# EAGLE board DanielDist_board_1.0 (EAGLE 7.6.0)
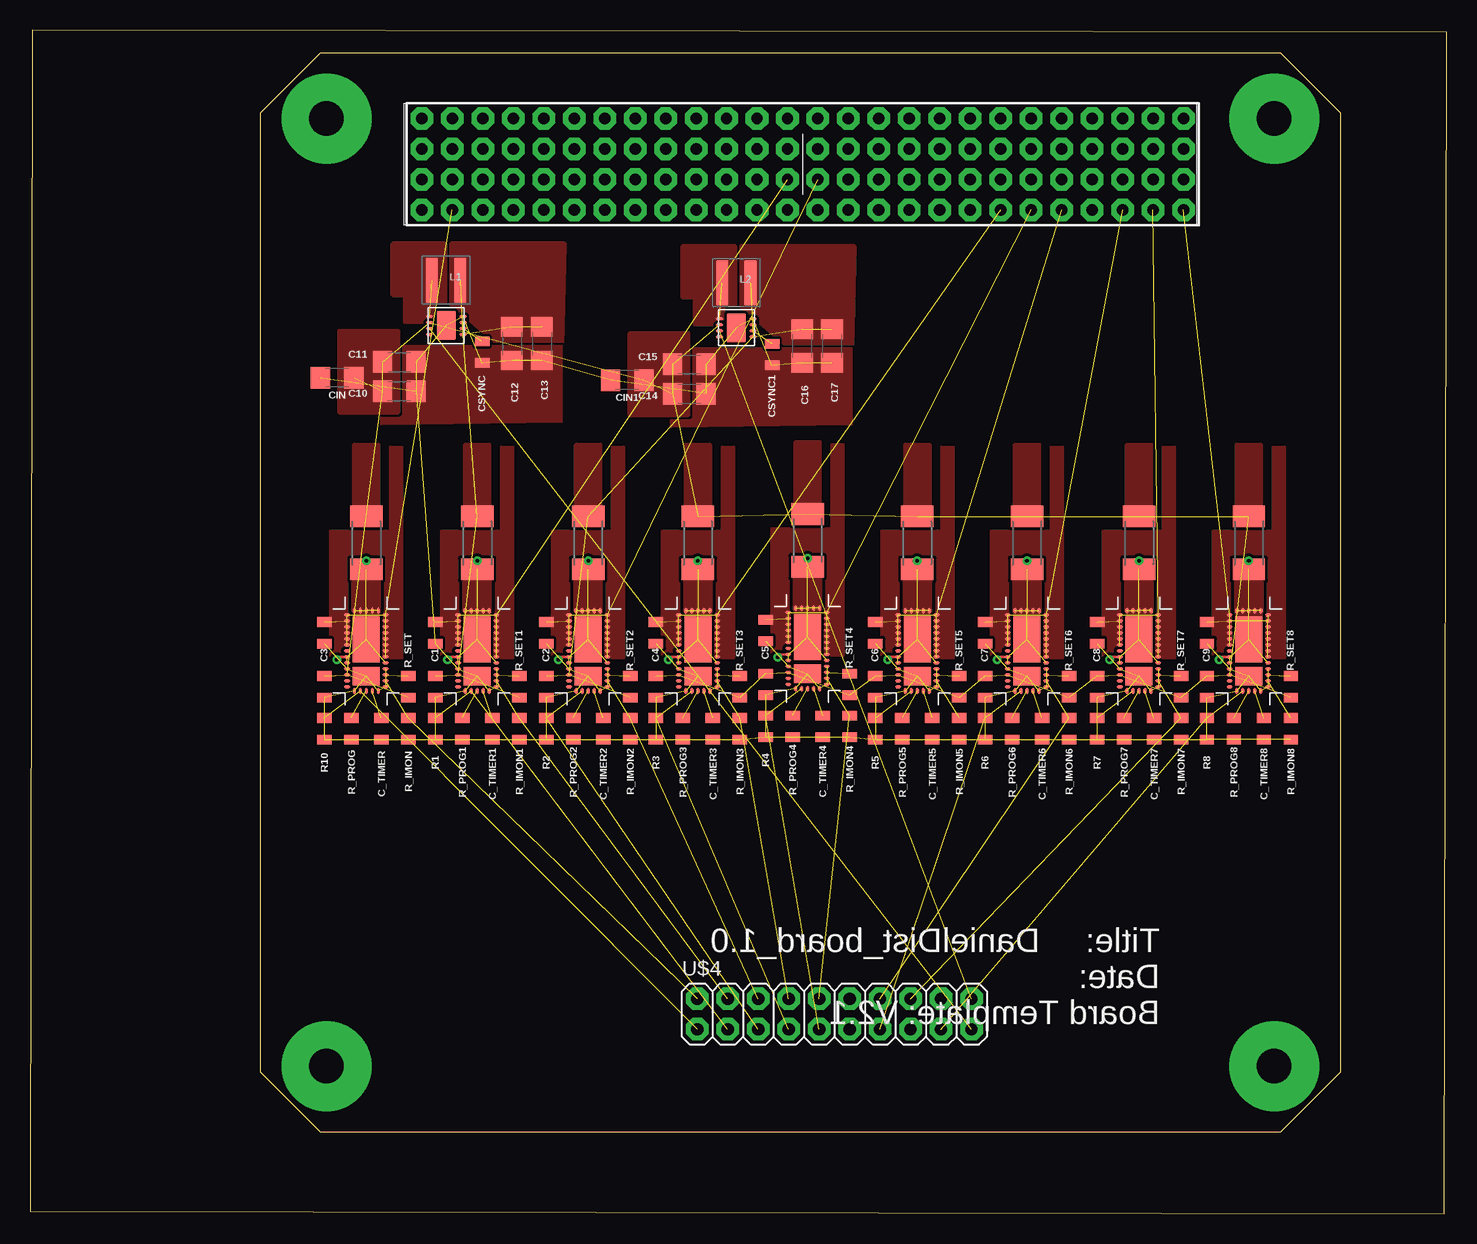
[diagram p0: board, top side]
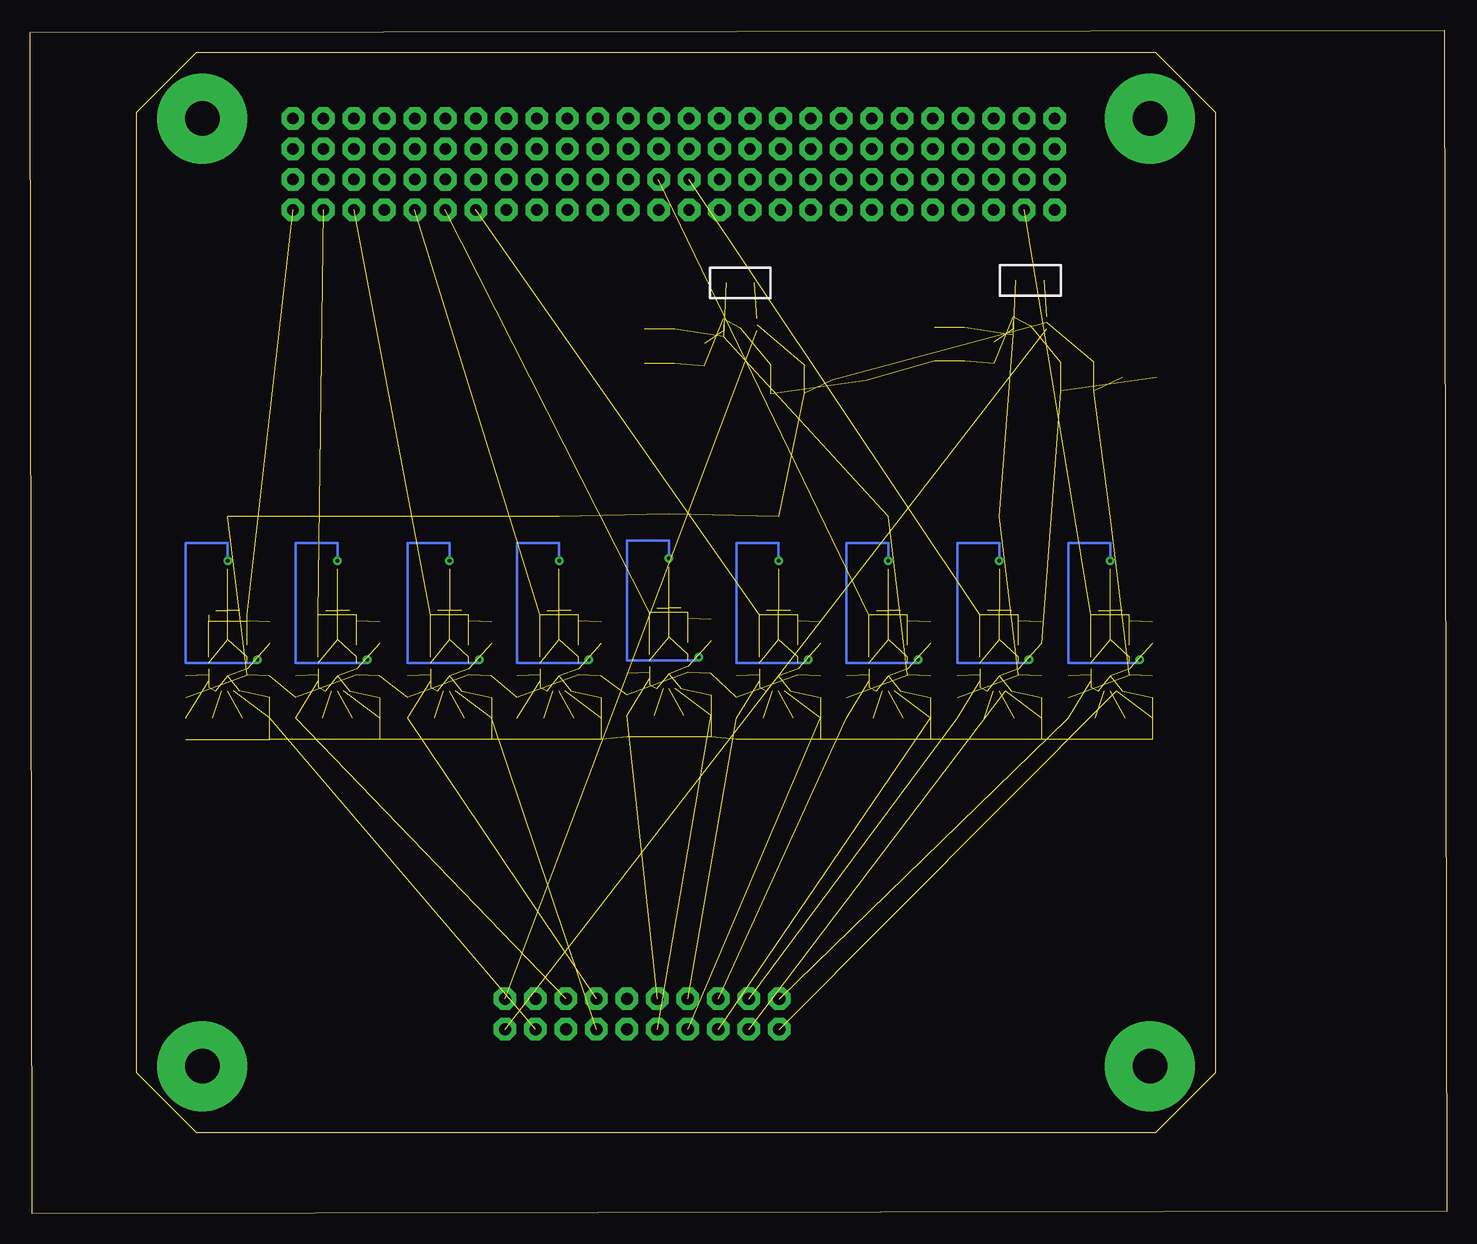
[diagram p1: board, bottom side, seen from below]

Size 118.08 x 98.69 mm. Coordinates in mm from the lower left corner, seen from the top.
Outline: 0,0.2 117.88,0 118.08,98.49 0.2,98.69 0,0.2
Copper layers (1*16): Top 0.035mm / dielectric 1.5mm / Bottom 0.035mm
Design rules "default": minimum track width 10mil, minimum drill 24mil, track to track 8mil, track to pad 8mil, pad to pad 8mil, via to via 8mil, smd to smd 8mil, copper to edge 40mil, drill to drill 8mil, minimum pad ring 10mil, minimum via ring 8mil, stop-mask expansion 4mil, vias tented up to drill 0mil, thermal gap 10mil

## Footprints (pad centres in the part's own frame; a part is rotated, then mirrored left to right if it is on the bottom)
0805 = smd 0.8 x 1.2: 1 -0.9,0; 2 0.9,0
1206 = smd 1.6 x 1.8: 1 -1.4,0; 2 1.4,0
COILCRAFT = smd 0.965 x 3.708: 1 -1.182,0; 2 1.182,0
2010 = smd 1.8 x 2.7: 1 -2.2,0; 2 2.2,0
QFN-36 = smd 0.24 x 0.5: P1 -3,-1.6; P2 -2.5,-1.6; P3 -2,-1.6; P4 -1.5,-1.6; P5 -1,-1.6; P6 -0.5,-1.6; P7 0,-1.6; P8 0.5,-1.6; P9 1,-1.6; P10 1.5,-1.6; P11 2,-1.6; P12 2.5,-1.6; P13 3,-1.6; P19 3,1.6; P20 2.5,1.6; P21 2,1.6; P22 1.5,1.6; P23 1,1.6; P24 0.5,1.6; P25 0,1.6; P26 -0.5,1.6; P27 -1,1.6; P28 -1.5,1.6; P29 -2,1.6; P30 -2.5,1.6; P31 -3,1.6 | smd 0.5 x 0.24: P14 3.35,-1; P15 3.35,-0.5; P16 3.35,0; P17 3.35,0.5; P18 3.35,1; P32 -3.35,1; P33 -3.35,0.5; P34 -3.35,0; P35 -3.35,-0.5; P36 -3.35,-1 | smd 1.514 x 2.25: P$37 -2.118,0 | smd 3.836 x 2.25: P$38 0.957,0
4X26_CONNECTOR_(V2.2) = drill 0.953 pad 1.88 octagon: P$1 -31.75,31.88; P$2 -31.75,34.42; P$3 -31.75,36.96; P$4 -31.75,39.5; P$5 -29.21,31.88; P$6 -29.21,34.42; P$7 -29.21,36.96; P$8 -29.21,39.5; P$9 -26.67,31.88; P$10 -26.67,34.42; P$11 -26.67,36.96; P$12 -26.67,39.5; P$13 -24.13,31.88; P$14 -24.13,34.42; P$15 -24.13,36.96; P$16 -24.13,39.5; P$17 -21.59,31.88; P$18 -21.59,34.42; P$19 -21.59,36.96; P$20 -21.59,39.5; P$21 -19.05,31.88; P$22 -19.05,34.42; P$23 -19.05,36.96; P$24 -19.05,39.5; P$25 -16.51,31.88; P$26 -16.51,34.42; P$27 -16.51,36.96; P$28 -16.51,39.5; P$29 -13.97,31.88; P$30 -13.97,34.42; P$31 -13.97,36.96; P$32 -13.97,39.5; P$33 -11.43,31.88; P$34 -11.43,34.42; P$35 -11.43,36.96; P$36 -11.43,39.5; P$37 -8.89,31.88; P$38 -8.89,34.42; P$39 -8.89,36.96; P$40 -8.89,39.5; P$41 -6.35,31.88; P$42 -6.35,34.42; P$43 -6.35,36.96; P$44 -6.35,39.5; P$45 -3.81,31.88; P$46 -3.81,34.42; P$47 -3.81,36.96; P$48 -3.81,39.5; P$49 -1.27,31.88; P$50 -1.27,34.42; P$51 -1.27,36.96; P$52 -1.27,39.5; P$53 1.27,31.88; P$54 1.27,34.42; P$55 1.27,36.96; P$56 1.27,39.5; P$57 3.81,31.88; P$58 3.81,34.42; P$59 3.81,36.96; P$60 3.81,39.5; P$61 6.35,31.88; P$62 6.35,34.42; P$63 6.35,36.96; P$64 6.35,39.5; P$65 8.89,31.88; P$66 8.89,34.42; P$67 8.89,36.96; P$68 8.89,39.5; P$69 11.43,31.88; P$70 11.43,34.42; P$71 11.43,36.96; P$72 11.43,39.5; P$73 13.97,31.88; P$74 13.97,34.42; P$75 13.97,36.96; P$76 13.97,39.5; P$77 16.51,31.88; P$78 16.51,34.42; P$79 16.51,36.96; P$80 16.51,39.5; P$81 19.05,31.88; P$82 19.05,34.42; P$83 19.05,36.96; P$84 19.05,39.5; P$85 21.59,31.88; P$86 21.59,34.42; P$87 21.59,36.96; P$88 21.59,39.5; P$89 24.13,31.88; P$90 24.13,34.42; P$91 24.13,36.96; P$92 24.13,39.5; P$93 26.67,31.88; P$94 26.67,34.42; P$95 26.67,36.96; P$96 26.67,39.5; P$97 29.21,31.88; P$98 29.21,34.42; P$99 29.21,36.96; P$100 29.21,39.5; P$101 31.75,31.88; P$102 31.75,34.42; P$103 31.75,36.96; P$104 31.75,39.5
BOARD_TEMPLATE_(V2.1) = drill 2.9 pad 7.5: P$1 -39.5,39.5; P$2 -39.5,-39.5; P$3 39.5,-39.5; P$4 39.5,39.5
2X10 = drill 1.016 pad 1.88 octagon: 1 -11.43,-1.27; 2 -11.43,1.27; 3 -8.89,-1.27; 4 -8.89,1.27; 5 -6.35,-1.27; 6 -6.35,1.27; 7 -3.81,-1.27; 8 -3.81,1.27; 9 -1.27,-1.27; 10 -1.27,1.27; 11 1.27,-1.27; 12 1.27,1.27; 13 3.81,-1.27; 14 3.81,1.27; 15 6.35,-1.27; 16 6.35,1.27; 17 8.89,-1.27; 18 8.89,1.27; 19 11.43,-1.27; 20 11.43,1.27
8-LFCSP = smd 0.6 x 0.24: P$1 -1.4,0.75; P$2 -1.4,0.25; P$3 -1.4,-0.25; P$4 -1.4,-0.75; P$5 1.4,-0.75; P$6 1.4,-0.25; P$7 1.4,0.25; P$8 1.4,0.75 | smd 1.6 x 2.44: P$9 0,0

## Placement (x,y rotation side)
C1  [0805]  33.79,43.94 270 top
C2  [0805]  43.03,43.94 270 top
C3  [0805]  24.54,43.94 270 top
C4  [0805]  52.18,43.94 270 top
C5  [0805]  61.32,44.14 270 top
C6  [0805]  70.46,43.94 270 top
C7  [0805]  79.61,43.94 270 top
C8  [0805]  88.96,43.94 270 top
C9  [0805]  98.1,43.94 270 top
C10  22 uF  [1206]  30.78,68.58 0 top
C11  22 uF  [1206]  30.78,71.02 0 top
C12  47 uF  [1206]  40.18,72.54 270 top
C13  22 uF  [1206]  42.67,72.54 270 top
C14  22 uF  [1206]  54.97,68.38 0 top
C15  22 uF  [1206]  54.97,70.82 0 top
C16  47 uF  [1206]  64.36,72.34 270 top
C17  22 uF  [1206]  66.85,72.34 270 top
C_OUT  0.1u  [0805]  24.54,48.44 270 top
C_OUT1  0.1u  [0805]  33.79,48.44 270 top
C_OUT2  0.1u  [0805]  43.03,48.44 270 top
C_OUT3  0.1u  [0805]  52.18,48.44 270 top
C_OUT4  0.1u  [0805]  61.32,48.64 270 top
C_OUT5  0.1u  [0805]  70.46,48.44 270 top
C_OUT6  0.1u  [0805]  79.61,48.44 270 top
C_OUT7  0.1u  [0805]  88.96,48.44 270 top
C_OUT8  0.1u  [0805]  98.1,48.44 270 top
C_TIMER  3.9n  [0805]  29.29,40.44 270 top
C_TIMER1  3.9n  [0805]  38.54,40.44 270 top
C_TIMER2  3.9n  [0805]  47.78,40.44 270 top
C_TIMER3  3.9n  [0805]  56.93,40.44 270 top
C_TIMER4  3.9n  [0805]  66.07,40.64 270 top
C_TIMER5  3.9n  [0805]  75.21,40.44 270 top
C_TIMER6  3.9n  [0805]  84.36,40.44 270 top
C_TIMER7  3.9n  [0805]  93.71,40.44 270 top
C_TIMER8  3.9n  [0805]  102.85,40.44 270 top
CIN  47 uF  [1206]  25.6,69.7 180 top
CIN1  47 uF  [1206]  49.78,69.49 180 top
CSYNC  2.2 uF  [0805]  37.69,71.83 270 top
CSYNC1  2.2 uF  [0805]  61.87,71.63 270 top
L1  1 mH  [COILCRAFT]  34.7,77.83 180 top
L2  1 mH  [COILCRAFT]  58.88,77.62 180 top
R1  100k  [0805]  33.79,40.44 90 top
R2  100k  [0805]  43.03,40.44 90 top
R3  100k  [0805]  52.18,40.44 90 top
R4  100k  [0805]  61.32,40.64 90 top
R5  100k  [0805]  70.46,40.44 90 top
R6  100k  [0805]  79.61,40.44 90 top
R7  100k  [0805]  88.96,40.44 90 top
R8  100k  [0805]  98.1,40.44 90 top
R10  100k  [0805]  24.54,40.44 90 top
R_IMON  42.2k  [0805]  31.54,40.44 90 top
R_IMON1  42.2k  [0805]  40.79,40.44 90 top
R_IMON2  42.2k  [0805]  50.03,40.44 90 top
R_IMON3  42.2k  [0805]  59.18,40.44 90 top
R_IMON4  42.2k  [0805]  68.32,40.64 90 top
R_IMON5  42.2k  [0805]  77.46,40.44 90 top
R_IMON6  42.2k  [0805]  86.61,40.44 90 top
R_IMON7  42.2k  [0805]  95.96,40.44 90 top
R_IMON8  42.2k  [0805]  105.1,40.44 90 top
R_PROG  4.99k  [0805]  26.79,40.44 90 top
R_PROG1  4.99k  [0805]  36.04,40.44 90 top
R_PROG2  4.99k  [0805]  45.28,40.44 90 top
R_PROG3  4.99k  [0805]  54.43,40.44 90 top
R_PROG4  4.99k  [0805]  63.57,40.64 90 top
R_PROG5  4.99k  [0805]  72.71,40.44 90 top
R_PROG6  4.99k  [0805]  81.86,40.44 90 top
R_PROG7  4.99k  [0805]  91.21,40.44 90 top
R_PROG8  4.99k  [0805]  100.35,40.44 90 top
R_SENSE  0.002  [2010]  28.04,55.94 270 top
R_SENSE1  0.002  [2010]  37.29,55.94 270 top
R_SENSE2  0.002  [2010]  46.53,55.94 270 top
R_SENSE3  0.002  [2010]  55.68,55.94 270 top
R_SENSE4  0.002  [2010]  64.82,56.14 270 top
R_SENSE5  0.002  [2010]  73.96,55.94 270 top
R_SENSE6  0.002  [2010]  83.11,55.94 270 top
R_SENSE7  0.002  [2010]  92.46,55.94 270 top
R_SENSE8  0.002  [2010]  101.6,55.94 270 top
R_SET  1k  [0805]  31.54,43.94 270 top
R_SET1  1k  [0805]  40.79,43.94 270 top
R_SET2  1k  [0805]  50.03,43.94 270 top
R_SET3  1k  [0805]  59.18,43.94 270 top
R_SET4  1k  [0805]  68.32,44.14 270 top
R_SET5  1k  [0805]  77.46,43.94 270 top
R_SET6  1k  [0805]  86.61,43.94 270 top
R_SET7  1k  [0805]  95.96,43.94 270 top
R_SET8  1k  [0805]  105.1,43.94 270 top
U$1  TI_SWITCH_TPS24750  [QFN-36]  28.04,46.94 90 top
U$2  2X26_CONNECTOR_(V2.2)  [4X26_CONNECTOR_(V2.2)]  64.41,51.82 0 top
U$3  BOARD_TEMPLATE_(V2.1)  [BOARD_TEMPLATE_(V2.1)]  64.21,51.82 0 top
U$4  M10X2  [2X10]  67.06,16.66 0 top
U$5  TI_SWITCH_TPS24750  [QFN-36]  37.29,46.94 90 top
U$6  TI_SWITCH_TPS24750  [QFN-36]  46.53,46.94 90 top
U$7  TI_SWITCH_TPS24750  [QFN-36]  55.68,46.94 90 top
U$8  TI_SWITCH_TPS24750  [QFN-36]  64.82,47.14 90 top
U$9  TI_SWITCH_TPS24750  [QFN-36]  73.96,46.94 90 top
U$10  TI_SWITCH_TPS24750  [QFN-36]  83.11,46.94 90 top
U$11  TI_SWITCH_TPS24750  [QFN-36]  92.46,46.94 90 top
U$12  TI_SWITCH_TPS24750  [QFN-36]  101.6,46.94 90 top
U$13  LINEAR_BUCK_LTC3624  [8-LFCSP]  34.7,74.07 0 top
U$14  LINEAR_BUCK_LTC3624  [8-LFCSP]  58.88,73.86 0 top

## Library data of the parts
C1-C17 C_OUT C_OUT1-C_OUT8 C_TIMER C_TIMER1-C_TIMER8 CIN CIN1 CSYNC CSYNC1 = SparkFun-Capacitors
L1 L2 = Inductors
R1-R8 R10 R_IMON R_IMON1-R_IMON8 R_PROG R_PROG1-R_PROG8 R_SENSE R_SENSE1-R_SENSE8 R_SET R_SET1-R_SET8 = SparkFun-Resistors
U$1 U$5-U$14 = ICs
U$2 U$3 = CubeSat(V2.2)
U$4 = SparkFun-Connectors

## Nets
3.3V_EN: R2.2 U$4.5 U$6.P33
3.3V_IMON: R_IMON2.2 U$4.6 U$6.P2
3.3V_VOUT: C_OUT2.1 U$2.P$54 U$6.P6 U$6.P7 U$6.P8 U$6.P9 U$6.P10 U$6.P11 U$6.P12 U$6.P13 U$6.P19 U$6.P20 U$6.P21 U$6.P22 U$6.P23 U$6.P24
3.3VBUCK_EN: U$4.20 U$14.P$3
3.3VBUCK_OUT: C2.1 C16.1 C17.1 L2.1 R_SENSE2.1 R_SET2.2 U$6.P29 U$14.P$5
5V_EN: R1.2 U$4.3 U$5.P33
5V_IMON: R_IMON1.2 U$4.4 U$5.P2
5V_VOUT: C_OUT1.1 U$2.P$50 U$5.P6 U$5.P7 U$5.P8 U$5.P9 U$5.P10 U$5.P11 U$5.P12 U$5.P13 U$5.P19 U$5.P20 U$5.P21 U$5.P22 U$5.P23 U$5.P24
5VBUCK_EN: U$4.19 U$13.P$3
5VBUCK_OUT: C1.1 C12.1 C13.1 L1.1 R_SENSE1.1 R_SET1.2 U$5.P29 U$13.P$5
ADCS2_EN: R4.2 U$4.9 U$8.P33
ADCS2_IMON: R_IMON4.2 U$4.10 U$8.P2
ADCS2_VOUT: C_OUT4.1 U$2.P$81 U$8.P6 U$8.P7 U$8.P8 U$8.P9 U$8.P10 U$8.P11 U$8.P12 U$8.P13 U$8.P19 U$8.P20 U$8.P21 U$8.P22 U$8.P23 U$8.P24
BOOT_EN: R5.2 U$9.P33
BOOT_IMON: R_IMON5.2 U$9.P2
BOOT_VOUT: C_OUT5.1 U$2.P$85 U$9.P6 U$9.P7 U$9.P8 U$9.P9 U$9.P10 U$9.P11 U$9.P12 U$9.P13 U$9.P19 U$9.P20 U$9.P21 U$9.P22 U$9.P23 U$9.P24
COM1_EN: R8.2 U$4.17 U$12.P33
COM1_IMON: R_IMON8.2 U$12.P2
COM1_VOUT: C_OUT8.1 U$2.P$101 U$12.P6 U$12.P7 U$12.P8 U$12.P9 U$12.P10 U$12.P11 U$12.P12 U$12.P13 U$12.P19 U$12.P20 U$12.P21 U$12.P22 U$12.P23 U$12.P24
COM2_EN: R7.2 U$11.P33
COM2_IMON: R_IMON7.2 U$4.16 U$11.P2
COM2_VOUT: C_OUT7.1 U$2.P$97 U$11.P6 U$11.P7 U$11.P8 U$11.P9 U$11.P10 U$11.P11 U$11.P12 U$11.P13 U$11.P19 U$11.P20 U$11.P21 U$11.P22 U$11.P23 U$11.P24
DRAIN: R_SENSE.2 U$1.P5 U$1.P14 U$1.P15 U$1.P16 U$1.P17 U$1.P18 U$1.P26 U$1.P27 U$1.P$38
DRAIN1: R_SENSE1.2 U$5.P5 U$5.P14 U$5.P15 U$5.P16 U$5.P17 U$5.P18 U$5.P26 U$5.P27 U$5.P$38
DRAIN2: R_SENSE2.2 U$6.P5 U$6.P14 U$6.P15 U$6.P16 U$6.P17 U$6.P18 U$6.P26 U$6.P27 U$6.P$38
DRAIN3: R_SENSE3.2 U$7.P5 U$7.P14 U$7.P15 U$7.P16 U$7.P17 U$7.P18 U$7.P26 U$7.P27 U$7.P$38
DRAIN4: R_SENSE4.2 U$8.P5 U$8.P14 U$8.P15 U$8.P16 U$8.P17 U$8.P18 U$8.P26 U$8.P27 U$8.P$38
DRAIN5: R_SENSE5.2 U$9.P5 U$9.P14 U$9.P15 U$9.P16 U$9.P17 U$9.P18 U$9.P26 U$9.P27 U$9.P$38
DRAIN6: R_SENSE6.2 U$10.P5 U$10.P14 U$10.P15 U$10.P16 U$10.P17 U$10.P18 U$10.P26 U$10.P27 U$10.P$38
DRAIN7: R_SENSE7.2 U$11.P5 U$11.P14 U$11.P15 U$11.P16 U$11.P17 U$11.P18 U$11.P26 U$11.P27 U$11.P$38
DRAIN8: R_SENSE8.2 U$12.P5 U$12.P14 U$12.P15 U$12.P16 U$12.P17 U$12.P18 U$12.P26 U$12.P27 U$12.P$38
ESTIMAT_EN: R3.2 U$4.7 U$7.P33
ESTIMAT_IMON: R_IMON3.2 U$4.8 U$7.P2
ESTIMAT_VOUT: C_OUT3.1 U$2.P$77 U$7.P6 U$7.P7 U$7.P8 U$7.P9 U$7.P10 U$7.P11 U$7.P12 U$7.P13 U$7.P19 U$7.P20 U$7.P21 U$7.P22 U$7.P23 U$7.P24
GND: C1.2 C2.2 C3.2 C4.2 C5.2 C6.2 C7.2 C8.2 C9.2 C10.2 C11.2 C12.2 C13.2 C14.2 C15.2 C16.2 C17.2 C_OUT1.2 C_OUT2.2 C_OUT3.2 C_OUT4.2 C_OUT5.2 C_OUT6.2 C_OUT7.2 C_OUT8.2 C_OUT.2 C_TIMER1.2 C_TIMER2.2 C_TIMER3.2 C_TIMER4.2 C_TIMER5.2 C_TIMER6.2 C_TIMER7.2 C_TIMER8.2 C_TIMER.2 CIN1.2 CIN.2 CSYNC1.2 CSYNC.2 R1.1 R2.1 R3.1 R4.1 R5.1 R6.1 R7.1 R8.1 R10.1 R_IMON1.1 R_IMON2.1 R_IMON3.1 R_IMON4.1 R_IMON5.1 R_IMON6.1 R_IMON7.1 R_IMON8.1 R_IMON.1 R_PROG1.1 R_PROG2.1 R_PROG3.1 R_PROG4.1 R_PROG5.1 R_PROG6.1 R_PROG7.1 R_PROG8.1 R_PROG.1 U$1.P1 U$1.P4 U$1.P28 U$1.P32 U$1.P36 U$1.P$37 U$5.P1 U$5.P4 U$5.P28 U$5.P32 U$5.P36 U$5.P$37 U$6.P1 U$6.P4 U$6.P28 U$6.P32 U$6.P36 U$6.P$37 U$7.P1 U$7.P4 U$7.P28 U$7.P32 U$7.P36 U$7.P$37 U$8.P1 U$8.P4 U$8.P28 U$8.P32 U$8.P36 U$8.P$37 U$9.P1 U$9.P4 U$9.P28 U$9.P32 U$9.P36 U$9.P$37 U$10.P1 U$10.P4 U$10.P28 U$10.P32 U$10.P36 U$10.P$37 U$11.P1 U$11.P4 U$11.P28 U$11.P32 U$11.P36 U$11.P$37 U$12.P1 U$12.P4 U$12.P28 U$12.P32 U$12.P36 U$12.P$37 U$13.P$8 U$13.P$9 U$14.P$8 U$14.P$9
INPUT6_EN: U$4.11
INPUT6_IMON: U$4.12
INPUT8_EN: U$4.15
INPUT9_IMON: U$4.18
MODE: CSYNC.1 U$13.P$6 U$13.P$7
MODE1: CSYNC1.1 U$14.P$6 U$14.P$7
PPT_EN: R10.2 U$1.P33 U$4.1
PPT_IMON: R_IMON.2 U$1.P2 U$4.2
PPT_VOUT: C_OUT.1 U$1.P6 U$1.P7 U$1.P8 U$1.P9 U$1.P10 U$1.P11 U$1.P12 U$1.P13 U$1.P19 U$1.P20 U$1.P21 U$1.P22 U$1.P23 U$1.P24 U$2.P$5
PROG: R_PROG.2 U$1.P34
PROG1: R_PROG1.2 U$5.P34
PROG2: R_PROG2.2 U$6.P34
PROG3: R_PROG3.2 U$7.P34
PROG4: R_PROG4.2 U$8.P34
PROG5: R_PROG5.2 U$9.P34
PROG6: R_PROG6.2 U$10.P34
PROG7: R_PROG7.2 U$11.P34
PROG8: R_PROG8.2 U$12.P34
RAHS_EN: R6.2 U$4.13 U$10.P33
RAHS_IMON: R_IMON6.2 U$4.14 U$10.P2
RAHS_VOUT: C_OUT6.1 U$2.P$93 U$10.P6 U$10.P7 U$10.P8 U$10.P9 U$10.P10 U$10.P11 U$10.P12 U$10.P13 U$10.P19 U$10.P20 U$10.P21 U$10.P22 U$10.P23 U$10.P24
SET: R_SET.1 U$1.P3
SET1: R_SET1.1 U$5.P3
SET2: R_SET2.1 U$6.P3
SET3: R_SET3.1 U$7.P3
SET4: R_SET4.1 U$8.P3
SET5: R_SET5.1 U$9.P3
SET6: R_SET6.1 U$10.P3
SET7: R_SET7.1 U$11.P3
SET8: R_SET8.1 U$12.P3
SW: L1.2 U$13.P$1
SW1: L2.2 U$14.P$1
TIMER: C_TIMER.1 U$1.P35
TIMER1: C_TIMER1.1 U$5.P35
TIMER2: C_TIMER2.1 U$6.P35
TIMER3: C_TIMER3.1 U$7.P35
TIMER4: C_TIMER4.1 U$8.P35
TIMER5: C_TIMER5.1 U$9.P35
TIMER6: C_TIMER6.1 U$10.P35
TIMER7: C_TIMER7.1 U$11.P35
TIMER8: C_TIMER8.1 U$12.P35
VCC: C3.1 C4.1 C5.1 C6.1 C7.1 C8.1 C9.1 C10.1 C11.1 C14.1 C15.1 CIN1.1 CIN.1 R_SENSE3.1 R_SENSE4.1 R_SENSE5.1 R_SENSE6.1 R_SENSE7.1 R_SENSE8.1 R_SENSE.1 R_SET3.2 R_SET4.2 R_SET5.2 R_SET6.2 R_SET7.2 R_SET8.2 R_SET.2 U$1.P29 U$7.P29 U$8.P29 U$9.P29 U$10.P29 U$11.P29 U$12.P29 U$13.P$2 U$14.P$2

## Tracks (layer width: path | path; a pad name or v marks a point on that pad's centre or on a via)
3.3V_EN  (2 unrouted)
3.3V_IMON  (2 unrouted)
3.3V_VOUT  (15 unrouted)
  pour Top (isolate 0.25, rank 2, no thermals): 43.53,46.33 49.53,46.33 49.53,63.94 48.53,63.94 48.53,56.94 43.53,56.94
3.3VBUCK_EN  (1 unrouted)
3.3VBUCK_OUT  (7 unrouted)
  pour Top (rank 4, no thermals): 59.13,75.79 59.33,80.67 68.68,80.67 68.48,72.14 63.2,72.34
  pour Top (rank 3, no thermals): 45.53,58.44 47.53,58.44 47.53,64.06 45.53,64.06
5V_EN  (2 unrouted)
5V_IMON  (2 unrouted)
5V_VOUT  (15 unrouted)
  pour Top (isolate 0.25, rank 2, no thermals): 34.29,46.33 40.29,46.33 40.29,63.94 39.29,63.94 39.29,56.94 34.29,56.94
5VBUCK_EN  (1 unrouted)
5VBUCK_OUT  (7 unrouted)
  pour Top (rank 4, no thermals): 34.95,76 35.15,80.87 44.5,80.87 44.3,72.34 39.01,72.54
  pour Top (rank 3, no thermals): 36.29,58.44 38.29,58.44 38.29,64.06 36.29,64.06
ADCS2_EN  (2 unrouted)
ADCS2_IMON  (2 unrouted)
ADCS2_VOUT  (15 unrouted)
  pour Top (isolate 0.25, rank 2, no thermals): 61.82,46.53 67.82,46.53 67.82,64.14 66.82,64.14 66.82,57.14 61.82,57.14
BOOT_EN  (1 unrouted)
BOOT_IMON  (1 unrouted)
BOOT_VOUT  (15 unrouted)
  pour Top (isolate 0.25, rank 2, no thermals): 70.96,46.33 76.96,46.33 76.96,63.94 75.96,63.94 75.96,56.94 70.96,56.94
COM1_EN  (2 unrouted)
COM1_IMON  (1 unrouted)
COM1_VOUT  (15 unrouted)
  pour Top (isolate 0.25, rank 2, no thermals): 98.6,46.33 104.6,46.33 104.6,63.94 103.6,63.94 103.6,56.94 98.6,56.94
COM2_EN  (1 unrouted)
COM2_IMON  (2 unrouted)
COM2_VOUT  (15 unrouted)
  pour Top (isolate 0.25, rank 2, no thermals): 89.46,46.33 95.46,46.33 95.46,63.94 94.46,63.94 94.46,56.94 89.46,56.94
DRAIN  (9 unrouted)
  pour Top (no thermals): 27.04,48.94 27.04,53.94 29.04,53.94 29.04,48.94
DRAIN1  (9 unrouted)
  pour Top (no thermals): 36.29,48.94 36.29,53.94 38.29,53.94 38.29,48.94
DRAIN2  (9 unrouted)
  pour Top (no thermals): 45.53,48.94 45.53,53.94 47.53,53.94 47.53,48.94
DRAIN3  (9 unrouted)
  pour Top (no thermals): 54.68,48.94 54.68,53.94 56.68,53.94 56.68,48.94
DRAIN4  (9 unrouted)
  pour Top (no thermals): 63.82,49.14 63.82,54.14 65.82,54.14 65.82,49.14
DRAIN5  (9 unrouted)
  pour Top (no thermals): 72.96,48.94 72.96,53.94 74.96,53.94 74.96,48.94
DRAIN6  (9 unrouted)
  pour Top (no thermals): 82.11,48.94 82.11,53.94 84.11,53.94 84.11,48.94
DRAIN7  (9 unrouted)
  pour Top (no thermals): 91.46,48.94 91.46,53.94 93.46,53.94 93.46,48.94
DRAIN8  (9 unrouted)
  pour Top (no thermals): 100.6,48.94 100.6,53.94 102.6,53.94 102.6,48.94
ESTIMAT_EN  (2 unrouted)
ESTIMAT_IMON  (2 unrouted)
ESTIMAT_VOUT  (15 unrouted)
  pour Top (isolate 0.25, rank 2, no thermals): 52.68,46.33 58.68,46.33 58.68,63.94 57.68,63.94 57.68,56.94 52.68,56.94
GND  (123 unrouted)
  pour Top (rank 3, no thermals): 29.46,72.34 44.3,72.34 44.3,66.04 29.26,65.84
  pour Top (rank 3, no thermals): 53.64,72.14 68.48,72.14 68.48,65.84 53.44,65.63
MODE  (2 unrouted)
MODE1  (2 unrouted)
N$2  (via drill 0.3)
  Top 0.203: 26.54,46.44 25.7,46.43 25.57,46.29 v25.57,46.21
  Bottom 0.203: v25.57,46.21 25.54,45.94 31.54,45.94 31.54,55.94 28.04,55.94 v28.04,54.44 28.04,54.35
N$3  (via drill 0.3)
  Top 0.203: 35.79,46.44 34.95,46.43 34.81,46.29 v34.81,46.21
  Bottom 0.203: v34.81,46.21 34.79,45.94 40.79,45.94 40.79,55.94 37.29,55.94 v37.29,54.44 37.29,54.35
N$10  (via drill 0.3)
  Top 0.203: 45.03,46.44 44.2,46.43 44.06,46.29 v44.06,46.21
  Bottom 0.203: v44.06,46.21 44.03,45.94 50.03,45.94 50.03,55.94 46.53,55.94 v46.53,54.44 46.53,54.35
N$11  (via drill 0.3)
  Top 0.203: 54.18,46.44 53.34,46.43 53.2,46.29 v53.2,46.21
  Bottom 0.203: v53.2,46.21 53.18,45.94 59.18,45.94 59.18,55.94 55.68,55.94 v55.68,54.44 55.68,54.35
N$12  (via drill 0.3)
  Top 0.203: 63.32,46.64 62.48,46.63 62.35,46.5 v62.35,46.41
  Bottom 0.203: v62.35,46.41 62.32,46.14 68.32,46.14 68.32,56.14 64.82,56.14 v64.82,54.64 64.82,54.56
N$13  (via drill 0.3)
  Top 0.203: 72.46,46.44 71.63,46.43 71.49,46.29 v71.49,46.21
  Bottom 0.203: v71.49,46.21 71.46,45.94 77.46,45.94 77.46,55.94 73.96,55.94 v73.96,54.44 73.96,54.35
N$14  (via drill 0.3)
  Top 0.203: 81.61,46.44 80.77,46.43 80.63,46.29 v80.63,46.21
  Bottom 0.203: v80.63,46.21 80.61,45.94 86.61,45.94 86.61,55.94 83.11,55.94 v83.11,54.44 83.11,54.35
N$15  (via drill 0.3)
  Top 0.203: 90.96,46.44 90.12,46.43 89.98,46.29 v89.98,46.21
  Bottom 0.203: v89.98,46.21 89.96,45.94 95.96,45.94 95.96,55.94 92.46,55.94 v92.46,54.44 92.46,54.35
N$16  (via drill 0.3)
  Top 0.203: 100.1,46.44 99.26,46.43 99.13,46.29 v99.13,46.21
  Bottom 0.203: v99.13,46.21 99.1,45.94 105.1,45.94 105.1,55.94 101.6,55.94 v101.6,54.44 101.6,54.35
PPT_EN  (2 unrouted)
PPT_IMON  (2 unrouted)
PPT_VOUT  (15 unrouted)
  pour Top (isolate 0.25, rank 2, no thermals): 25.04,46.33 31.04,46.33 31.04,63.94 30.04,63.94 30.04,56.94 25.04,56.94
PROG  (1 unrouted)
PROG1  (1 unrouted)
PROG2  (1 unrouted)
PROG3  (1 unrouted)
PROG4  (1 unrouted)
PROG5  (1 unrouted)
PROG6  (1 unrouted)
PROG7  (1 unrouted)
PROG8  (1 unrouted)
RAHS_EN  (2 unrouted)
RAHS_IMON  (2 unrouted)
RAHS_VOUT  (15 unrouted)
  pour Top (isolate 0.25, rank 2, no thermals): 80.11,46.33 86.11,46.33 86.11,63.94 85.11,63.94 85.11,56.94 80.11,56.94
SET  (1 unrouted)
SET1  (1 unrouted)
SET2  (1 unrouted)
SET3  (1 unrouted)
SET4  (1 unrouted)
SET5  (1 unrouted)
SET6  (1 unrouted)
SET7  (1 unrouted)
SET8  (1 unrouted)
SW  (1 unrouted)
  pour Top (rank 2, no thermals): 33.53,74.37 31.29,74.37 31.29,76.61 30.28,76.61 30.28,80.87 34.54,80.87 34.54,76 33.53,76
SW1  (1 unrouted)
  pour Top (rank 2, no thermals): 57.71,74.17 55.47,74.17 55.47,76.4 54.46,76.4 54.46,80.67 58.72,80.67 58.72,75.79 57.71,75.79
TIMER  (1 unrouted)
TIMER1  (1 unrouted)
TIMER2  (1 unrouted)
TIMER3  (1 unrouted)
TIMER4  (1 unrouted)
TIMER5  (1 unrouted)
TIMER6  (1 unrouted)
TIMER7  (1 unrouted)
TIMER8  (1 unrouted)
VCC  (35 unrouted)
  pour Top (rank 3, no thermals): 27.04,58.44 29.04,58.44 29.04,64.06 27.04,64.06
  pour Top (rank 3, no thermals): 54.68,58.44 56.68,58.44 56.68,64.06 54.68,64.06
  pour Top (rank 3, no thermals): 63.82,58.64 65.82,58.64 65.82,64.27 63.82,64.27
  pour Top (rank 3, no thermals): 72.96,58.44 74.96,58.44 74.96,64.06 72.96,64.06
  pour Top (rank 3, no thermals): 82.11,58.44 84.11,58.44 84.11,64.06 82.11,64.06
  pour Top (rank 3, no thermals): 91.46,58.44 93.46,58.44 93.46,64.06 91.46,64.06
  pour Top (rank 3, no thermals): 100.6,58.44 102.6,58.44 102.6,64.06 100.6,64.06
  pour Top (no thermals): 30.68,66.85 30.68,73.56 25.81,73.56 25.81,66.85
  pour Top (no thermals): 54.86,66.65 54.86,73.36 49.99,73.36 49.99,66.65